# Altium PCB Pahuljica_lanac.PcbDoc
Units mil, origin at the board's own origin, x right, y up, seen from the top; angles counter-clockwise.
Board outline 6000 x 4000 mil, 2 copper layers (Top Layer, Bottom Layer); 14 components, 8 nets, 42 pads, 0 vias.
Unrouted connection lines stored in the file: 32.
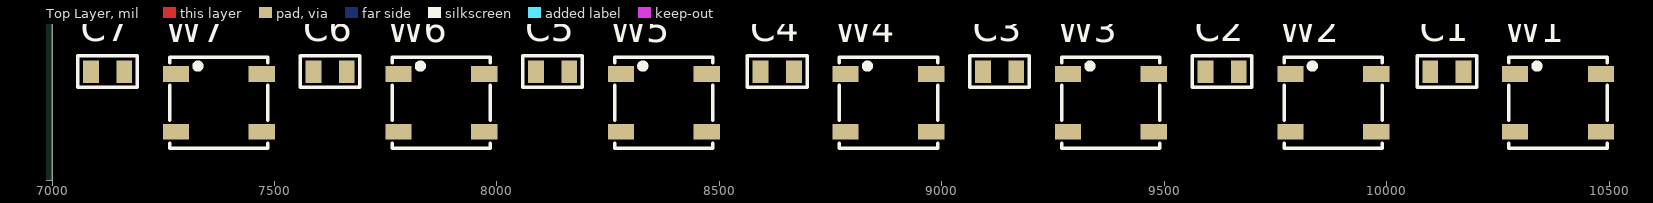
[diagram p0: Top Layer view]
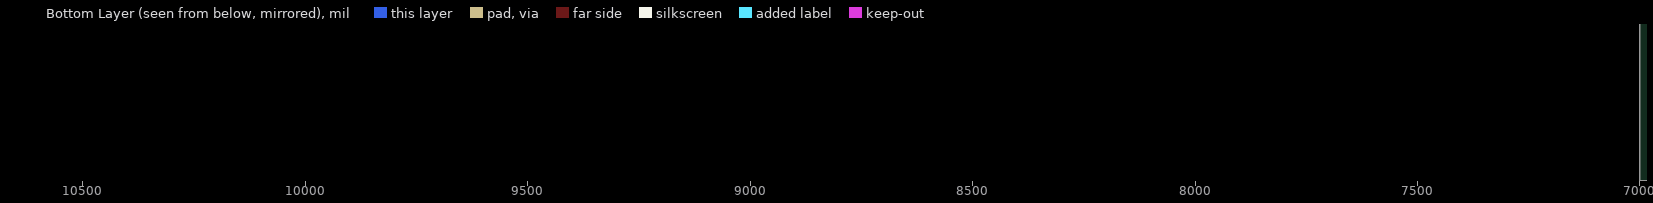
[diagram p1: Bottom Layer view, seen from below]

## Layer stack, top to bottom
Top Solder: solder mask 0.4, Solder Resist, Dk 3.5
Top Layer: signal copper 1.4
Dielectric 1: dielectric 12.6, FR-4, Dk 4.8
Bottom Layer: signal copper 1.4
Bottom Solder: solder mask 0.4, Solder Resist, Dk 3.5

## Board outline
1000,1000 7000,1000 7000,5000 1000,5000

## Design rules (kind name [scope] priority, off if disabled: settings)
Clearance Clearance_Polygon [InPolygon] p1: gap=10 ignorepadtopadclearanceinfootprint=TRUE
Clearance [All] p2: gap=5 ignorepadtopadclearanceinfootprint=TRUE
ComponentClearance Konektori2 [InComponent('CON2') vs InComponent('CON3')] p1: gap=0 collisioncheckmode=3 verticalgap=0 showdistances=FALSE
ComponentClearance Konektori [InComponent('CON1') vs InComponent('CON3')] p2: gap=0 collisioncheckmode=3 verticalgap=0 showdistances=FALSE
ComponentClearance [All] p3: gap=7.87 collisioncheckmode=3 verticalgap=7.87 showdistances=FALSE
Height [All] p1: minheight=0 maxheight=1968.5 prefheight=500
HoleSize [All] p1: absolutevalues=TRUE maxlimit=248.03 minlimit=7.87 maxpercent=80.000 minpercent=20.000
HoleToHoleClearance [All] p1: gap=11.81 allowstackedmicrovias=TRUE
MinimumSolderMaskSliver [All] p1: minsoldermaskwidth=0
PolygonConnect PolygonConnect_2 [InNet('+5')] p1: connectstyle=Direct reliefconductorwidth=10 reliefentries=4 polygonreliefangle="90 Angle" airgapwidth=10
PolygonConnect PolygonConnect_1 [InNet('GND')] p2: connectstyle=Relief reliefconductorwidth=10 reliefentries=4 polygonreliefangle="90 Angle" airgapwidth=5
PolygonConnect [InNet('+3V3')] p3: connectstyle=Direct reliefconductorwidth=10 reliefentries=4 polygonreliefangle="90 Angle" airgapwidth=12
RoutingVias [All] p1: holewidth=11.81 width=23.62 viastyle="Through Hole" minholewidth=11.81 minwidth=23.62 maxholewidth=11.81 maxwidth=23.62
SilkToSilkClearance [All] p1: silktosilkclearance=3.94
SilkToSolderMaskClearance [IsPad] p1: minsilkscreentomaskgap=3.94 clearancetoexposedcopper=TRUE
SolderMaskExpansion [All] p1: expansion=3.94
Width [All] p1: maxlimit=80 minlimit=5 preferedwidth=12
23 further rules are at their usual default settings.

## Components (designator, comment, footprint, x,y, rotation, side; value= is the part's Value field where it differs from the comment)
C1 "100n / 50V" C0805 10135,1245 r0 top
C2 "100n / 50V" C0805 9630,1245 r0 top
C3 "100n / 50V" C0805 9130,1245 r0 top
C4 "100n / 50V" C0805 8630,1245 r0 top
C5 "100n / 50V" C0805 8125,1245 r0 top
C6 "100n / 50V" C0805 7625,1245 r0 top
C7 "100n / 50V" C0805 7125,1245 r0 top
W1 "WS2812" WS2812B 10385,1175 r0 top
W2 "WS2812" WS2812B 9880,1175 r0 top
W3 "WS2812" WS2812B 9380,1175 r0 top
W4 "WS2812" WS2812B 8880,1175 r0 top
W5 "WS2812" WS2812B 8375,1175 r0 top
W6 "WS2812" WS2812B 7875,1175 r0 top
W7 "WS2812" WS2812B 7375,1175 r0 top

## Footprints (in the part's own frame and the unit in brackets; to place one, negate y for a bottom-side part, rotate by r counter-clockwise, add the part's x,y. Pads: shape width x height; smd on the part's side, far side on the other; paste and mask are expansions set on the pad)
C0805 [mm]
  rect 0.9x1.3 smd: 1(-0.95,0) 2(0.95,0)
  silkscreen extent -1.7,-0.9 1.7,0.9, body extent -1,-0.6 1,0.6, height 1.21
WS2812B [mm]
  rect 1.5x0.9 smd: 1(-2.45,1.65) 2(-2.45,-1.65) 3(2.45,-1.65) 4(2.45,1.65)
  silkscreen extent -2.8,-2.6 2.8,2.6, body extent -2.7,-2.5 2.7,2.5, height 1.58

## Part data
C1 C2 C3 C4 C5 C6 C7: library part C2012X7R1H104K085AA, "CAP CER 0.1UF 50V X7R 0805", Capacitance=100nF, Case/Package=0805, Case Code (Metric)=2012, Dielectric=X7R, Dielectric Material=Ceramic, Manufacturer 1=TDK, Max Operating Temperature=125°C, Min Operating Temperature=-55°C, Package Quantity=1, Supplier Part Number 1=445-7534-1-ND, Tolerance=10%, Voltage=50V, Case Code (Imperial)=0805, ComponentLink1Description=https://datasheet.ciiva.com/11788/0900766b80c1bb00-11788128.pdf?src-supplier=RSComponents, ComponentLink1URL=https://datasheet.ciiva.com/11788/0900766b80c1bb00-11788128.pdf?src-supplier=RSComponents, ComponentLink2Description=https://datasheet.ciiva.com/6250/tdkmlcccaprange-6250821.pdf?src-supplier=Digi-Key, ComponentLink2URL=https://datasheet.ciiva.com/6250/tdkmlcccaprange-6250821.pdf?src-supplier=Digi-Key, ComponentLink3Description=https://datasheet.ciiva.com/24191/e412-c-24191447.pdf?src-supplier=Future+Electronics, ComponentLink3URL=https://datasheet.ciiva.com/24191/e412-c-24191447.pdf?src-supplier=Future+Electronics, ComponentLink4Description=https://datasheet.ciiva.com/6250/tdkmlcccaprange-6250824.pdf?src-supplier=Digi-Key, ComponentLink4URL=https://datasheet.ciiva.com/6250/tdkmlcccaprange-6250824.pdf?src-supplier=Digi-Key, ComponentLink5Description=https://datasheet.ciiva.com/23803/1796654-23803035.pdf?src-supplier=Newark, ComponentLink5URL=https://datasheet.ciiva.com/23803/1796654-23803035.pdf?src-supplier=Newark, ComponentLink6Description=https://datasheet.ciiva.com/28602/1571323-28602204.pdf?src-supplier=Element14, ComponentLink6URL=https://datasheet.ciiva.com/28602/1571323-28602204.pdf?src-supplier=Element14, Composition=Ceramic, Depth=1.25mm, Height=0.85mm, Lead Free="Lead Free", Length=2mm, Manufacturer Part Number 1=C2012X7R1H104K085AA, Mount="Surface Mount", Number of Pins=2, Packaging="Tape and Reel", Pricing 1="1=0,17000, 10=0,11900, 100=0,05610, 500=0,03936, 1000=0,03258 (USD)", Radiation Hardening=No, REACH SVHC="No SVHC", RoHS=Yes, Stock 1=245442, Supplier 1=Digi-Key, Termination=SMD/SMT, Thickness=0.037inch, Voltage Rating=50V, Voltage Rating (DC)=50V, Weight=0.000194oz, Width=0.049inch
W1 W2 W3 W4 W5 W6 W7: library part COM-11821, "ADDRESS LED DISCRETE SERIAL RGB", LCSC PART #=C114586, Manufacturer 1=SparkFun, Supplier Part Number 1=1568-1800-ND, ComponentLink1Description=https://media.digikey.com/pdf/Data%20Sheets/Sparkfun%20PDFs/WS2812_Breakout_Hookup_Guide.pdf?src-supplier=Digi-Key, ComponentLink1URL=https://media.digikey.com/pdf/Data%20Sheets/Sparkfun%20PDFs/WS2812_Breakout_Hookup_Guide.pdf?src-supplier=Digi-Key, ComponentLink2Description=http://cdn.sparkfun.com/datasheets/Components/LED/WS2812.pdf?src-supplier=Digi-Key, ComponentLink2URL=http://cdn.sparkfun.com/datasheets/Components/LED/WS2812.pdf?src-supplier=Digi-Key, Manufacturer Part Number 1=COM-11821, Pricing 1="1=0,50000 (USD)", RoHS=No, Stock 1=226, Supplier 1=Digi-Key

## Nets (pads, with @x,y where several pads share a name; then routed paths per layer and width w, separated by ;. In a path a pad name is that pad's centre, name@x,y a point inside that pad or via, vN(x,y) a via of type N, cw(c..) or ccw(c..) an arc to the next point about the centre after c; other vN are vias at no path point)
+5: C1.2 C2.2 C3.2 C4.2 C5.2 C6.2 C7.2 W1.1 W2.1 W3.1 W4.1 W5.1 W6.1 W7.1
GND: C1.1 C2.1 C3.1 C4.1 C5.1 C6.1 C7.1 W1.3 W2.3 W3.3 W4.3 W5.3 W6.3 W7.3
NetW1_2: W1.2 W2.4
NetW2_2: W2.2 W3.4
NetW3_2: W3.2 W4.4
NetW4_2: W4.2 W5.4
NetW5_2: W5.2 W6.4
NetW6_2: W6.2 W7.4
pads on no net: W1.4 W7.2